# Altium PCB PCB_Blocks.PcbDoc
Units mm, origin at the board's own origin, x right, y up, seen from the top; angles counter-clockwise.
Board outline 230 x 130 mm, 2 copper layers (Top Layer, Bottom Layer), stack 1.671 mm thick; 23 components, 60 nets, 230 pads, 0 vias.
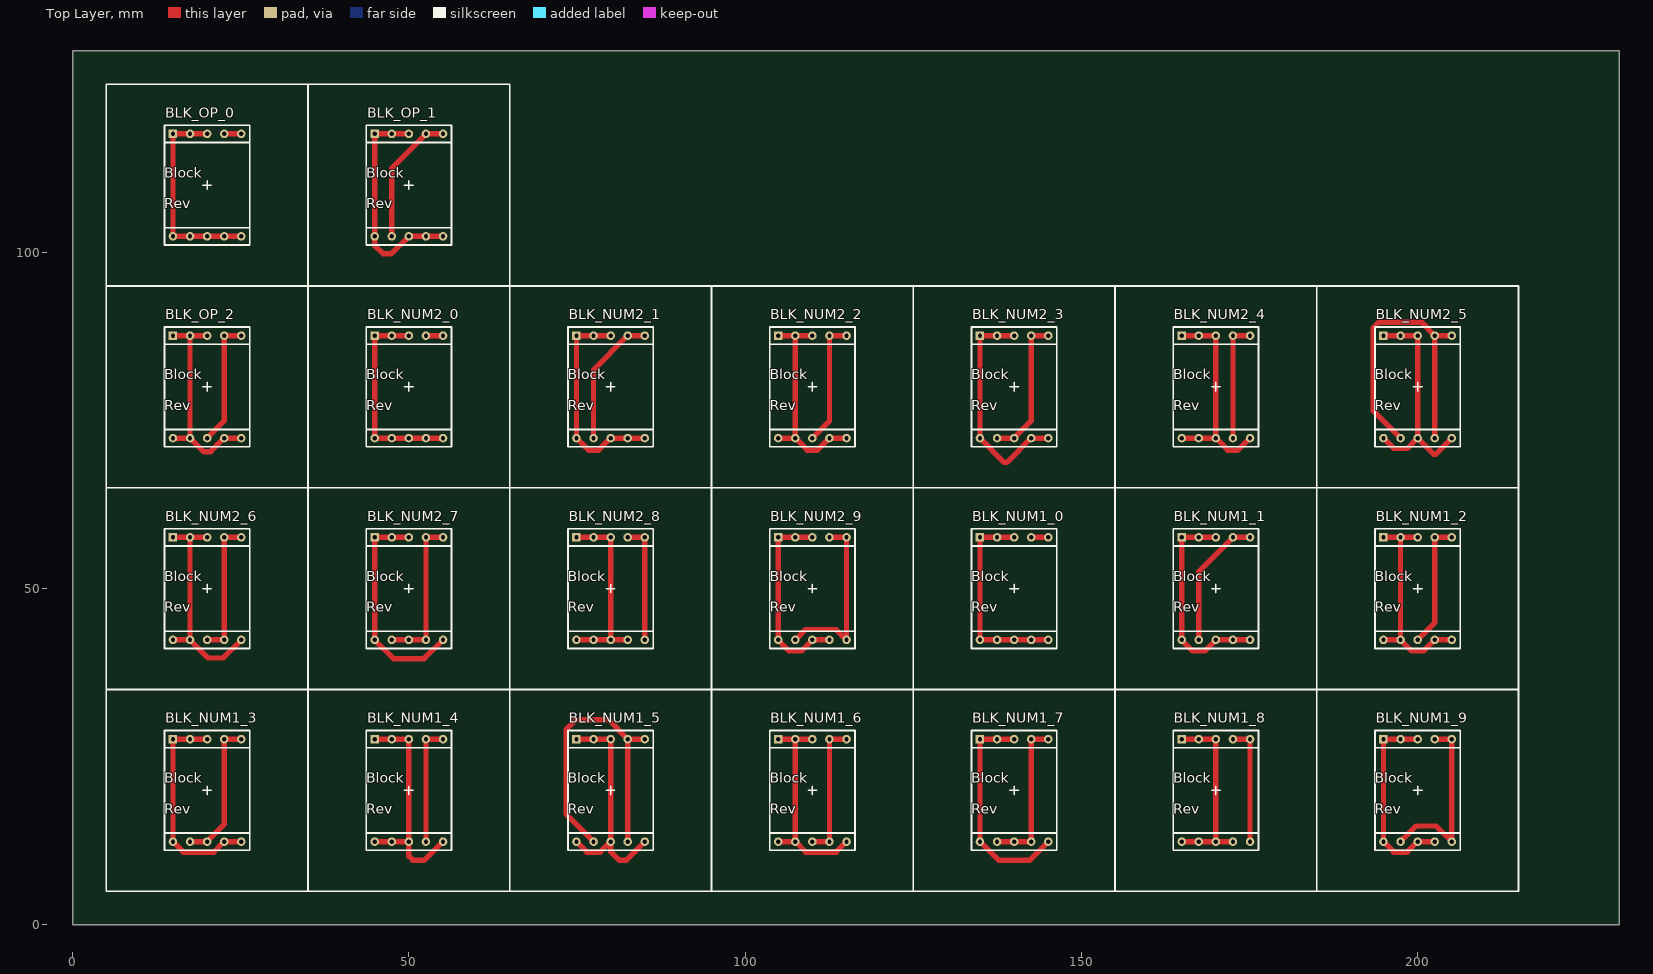
[diagram p0: Top Layer view]
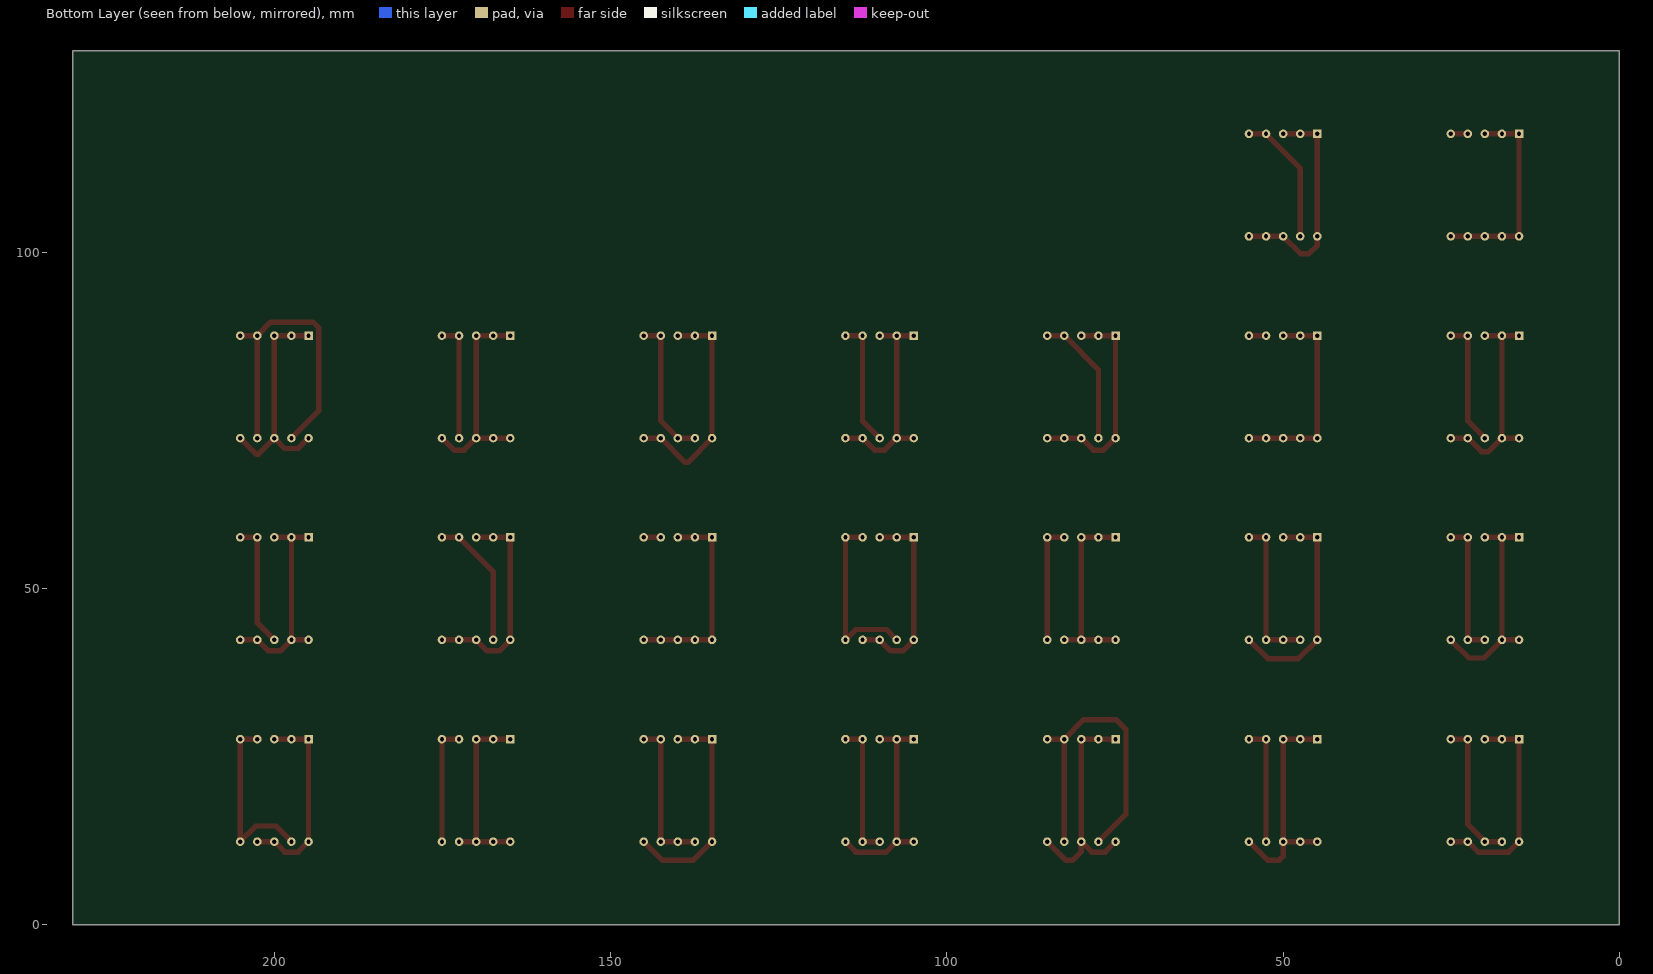
[diagram p1: Bottom Layer view, seen from below]

## Layer stack, top to bottom
Top Solder: solder mask 0.0102, Solder Resist, Dk 3.5
Top Layer: signal copper 0.0356
Dielectric 1: dielectric 1.6, FR-4, Dk 4.8
Bottom Layer: signal copper 0.0356
Bottom Solder: solder mask 0.0102, Solder Resist, Dk 3.5

## Board outline
0,0 0,130 230,130 230,0

## Design rules (kind name [scope] priority, off if disabled: settings)
Clearance [All] p1: gap=0.5 ignorepadtopadclearanceinfootprint=FALSE
PolygonConnect [All] p1: connectstyle=Relief reliefconductorwidth=0.254 reliefentries=4 polygonreliefangle="90 Angle" airgapwidth=0.254
RoutingLayers [All] p1: top layer_v5=TRUE bottom layer_v5=FALSE
RoutingVias [All] p1: holewidth=0.9 width=1.2 viastyle="Through Hole" minholewidth=0.9 minwidth=1.2 maxholewidth=0.9 maxwidth=1.2
SolderMaskExpansion [All] p1: expansion=0.102 istentingtop=FALSE
UnRoutedNet [All] p1: checkbadconnections=TRUE
Width [All] p1: maxlimit=0.8 minlimit=0.8 preferedwidth=0.8
28 further rules are at their usual default settings.

## Components (designator, comment, footprint, x,y, rotation, side; value= is the part's Value field where it differs from the comment)
BLK_NUM1_0 "6x5 Block" Block_6x5 140,57.62 r0 top
BLK_NUM1_1 "6x5 Block" Block_6x5 170,57.62 r0 top
BLK_NUM1_2 "6x5 Block" Block_6x5 200,57.62 r0 top
BLK_NUM1_3 "6x5 Block" Block_6x5 20,27.62 r0 top
BLK_NUM1_4 "6x5 Block" Block_6x5 50,27.62 r0 top
BLK_NUM1_5 "6x5 Block" Block_6x5 80,27.62 r0 top
BLK_NUM1_6 "6x5 Block" Block_6x5 110,27.62 r0 top
BLK_NUM1_7 "6x5 Block" Block_6x5 140,27.62 r0 top
BLK_NUM1_8 "6x5 Block" Block_6x5 170,27.62 r0 top
BLK_NUM1_9 "6x5 Block" Block_6x5 200,27.62 r0 top
BLK_NUM2_0 "6x5 Block" Block_6x5 50,87.62 r0 top
BLK_NUM2_1 "6x5 Block" Block_6x5 80,87.62 r0 top
BLK_NUM2_2 "6x5 Block" Block_6x5 110,87.62 r0 top
BLK_NUM2_3 "6x5 Block" Block_6x5 140,87.62 r0 top
BLK_NUM2_4 "6x5 Block" Block_6x5 170,87.62 r0 top
BLK_NUM2_5 "6x5 Block" Block_6x5 200,87.62 r0 top
BLK_NUM2_6 "6x5 Block" Block_6x5 20,57.62 r0 top
BLK_NUM2_7 "6x5 Block" Block_6x5 50,57.62 r0 top
BLK_NUM2_8 "6x5 Block" Block_6x5 80,57.62 r0 top
BLK_NUM2_9 "6x5 Block" Block_6x5 110,57.62 r0 top
BLK_OP_0 "6x5 Block" Block_6x5 20,117.62 r0 top
BLK_OP_1 "6x5 Block" Block_6x5 50,117.62 r0 top
BLK_OP_2 "6x5 Block" Block_6x5 20,87.62 r0 top

## Footprints (in the part's own frame and the unit in brackets; to place one, negate y for a bottom-side part, rotate by r counter-clockwise, add the part's x,y. Pads: shape width x height; smd on the part's side, far side on the other; paste and mask are expansions set on the pad)
Block_6x5 [mm]
  rect 1.27x1.27 hole 0.635: 1(-5.08,0)
  round 1.27 hole 0.635: 2(-2.54,0) 3(0,0) 4(2.54,0) 5(5.08,0) 6(5.08,-15.24) 7(2.54,-15.24) 8(0,-15.24) 9(-2.54,-15.24) 10(-5.08,-15.24)
  silkscreen extent -6.35,-16.51 6.35,1.27

## Part data
BLK_NUM1_0 BLK_NUM1_1 BLK_NUM1_2 BLK_NUM1_3 BLK_NUM1_4 BLK_NUM1_5 BLK_NUM1_6 BLK_NUM1_7 BLK_NUM1_8 BLK_NUM1_9 BLK_NUM2_0 BLK_NUM2_1 BLK_NUM2_2 BLK_NUM2_3 BLK_NUM2_4 BLK_NUM2_5 BLK_NUM2_6 BLK_NUM2_7 BLK_NUM2_8 BLK_NUM2_9 BLK_OP_0 BLK_OP_1 BLK_OP_2: library part Block_6x5

## Nets (pads, with @x,y where several pads share a name; then routed paths per layer and width w, separated by ;. In a path a pad name is that pad's centre, name@x,y a point inside that pad or via, vN(x,y) a via of type N, cw(c..) or ccw(c..) an arc to the next point about the centre after c; other vN are vias at no path point)
NetBLK_NUM1_0_1: BLK_NUM1_0.1 BLK_NUM1_0.2 BLK_NUM1_0.3 BLK_NUM1_0.6 BLK_NUM1_0.7 BLK_NUM1_0.8 BLK_NUM1_0.9 BLK_NUM1_0.10 | length 30.5
  Top Layer w0.8: BLK_NUM1_0.3 BLK_NUM1_0.2 BLK_NUM1_0.1 BLK_NUM1_0.10 BLK_NUM1_0.9 BLK_NUM1_0.8 BLK_NUM1_0.7 BLK_NUM1_0.6
NetBLK_NUM1_0_4: BLK_NUM1_0.4 BLK_NUM1_0.5 | length 2.5
  Top Layer w0.8: BLK_NUM1_0.4 BLK_NUM1_0.5
NetBLK_NUM1_1_1: BLK_NUM1_1.1 BLK_NUM1_1.2 BLK_NUM1_1.3 BLK_NUM1_1.6 BLK_NUM1_1.7 BLK_NUM1_1.8 BLK_NUM1_1.10 | length 31.8
  Top Layer w0.8: BLK_NUM1_1.3 BLK_NUM1_1.2 BLK_NUM1_1.1 BLK_NUM1_1.10 166.555,40.745 168.365,40.745 BLK_NUM1_1.8 BLK_NUM1_1.7 BLK_NUM1_1.6
NetBLK_NUM1_1_4: BLK_NUM1_1.4 BLK_NUM1_1.5 BLK_NUM1_1.9 | length 19.9
  Top Layer w0.8: BLK_NUM1_1.9 167.46,52.54 BLK_NUM1_1.4 BLK_NUM1_1.5
NetBLK_NUM1_2_1: BLK_NUM1_2.1 BLK_NUM1_2.2 BLK_NUM1_2.3 BLK_NUM1_2.6 BLK_NUM1_2.7 BLK_NUM1_2.9 BLK_NUM1_2.10 | length 31.8
  Top Layer w0.8: BLK_NUM1_2.10 BLK_NUM1_2.9 ; BLK_NUM1_2.1 BLK_NUM1_2.2 ; BLK_NUM1_2.3 BLK_NUM1_2.2 ; BLK_NUM1_2.6 BLK_NUM1_2.7 200.905,40.745 199.095,40.745 BLK_NUM1_2.9 ; BLK_NUM1_2.9 BLK_NUM1_2.2
NetBLK_NUM1_2_4: BLK_NUM1_2.4 BLK_NUM1_2.5 BLK_NUM1_2.8 | length 18.8
  Top Layer w0.8: BLK_NUM1_2.8 202.54,44.92 BLK_NUM1_2.4 BLK_NUM1_2.5
NetBLK_NUM1_3_1: BLK_NUM1_3.1 BLK_NUM1_3.2 BLK_NUM1_3.3 BLK_NUM1_3.6 BLK_NUM1_3.7 BLK_NUM1_3.10 | length 31.8
  Top Layer w0.8: BLK_NUM1_3.3 BLK_NUM1_3.2 BLK_NUM1_3.1 BLK_NUM1_3.10 16.476,10.824 20.984,10.824 BLK_NUM1_3.7 BLK_NUM1_3.6
NetBLK_NUM1_3_4: BLK_NUM1_3.4 BLK_NUM1_3.5 BLK_NUM1_3.8 BLK_NUM1_3.9 | length 21.4
  Top Layer w0.8: BLK_NUM1_3.9 BLK_NUM1_3.8 22.54,14.92 BLK_NUM1_3.4 BLK_NUM1_3.5
NetBLK_NUM1_4_1: BLK_NUM1_4.1 BLK_NUM1_4.2 BLK_NUM1_4.3 BLK_NUM1_4.6 BLK_NUM1_4.8 BLK_NUM1_4.9 BLK_NUM1_4.10 | length 34
  Top Layer w0.8: BLK_NUM1_4.10 BLK_NUM1_4.9 BLK_NUM1_4.8 ; BLK_NUM1_4.1 BLK_NUM1_4.2 BLK_NUM1_4.3 BLK_NUM1_4.8 ; BLK_NUM1_4.6 52.33,9.63 50.583,9.63 50,10.213 BLK_NUM1_4.8
NetBLK_NUM1_4_4: BLK_NUM1_4.4 BLK_NUM1_4.5 BLK_NUM1_4.7 | length 17.8
  Top Layer w0.8: BLK_NUM1_4.7 BLK_NUM1_4.4 BLK_NUM1_4.5
NetBLK_NUM1_5_1: BLK_NUM1_5.1 BLK_NUM1_5.2 BLK_NUM1_5.3 BLK_NUM1_5.6 BLK_NUM1_5.8 BLK_NUM1_5.10 | length 34.9
  Top Layer w0.8: BLK_NUM1_5.10 76.476,10.824 78.444,10.824 BLK_NUM1_5.8 ; BLK_NUM1_5.1 BLK_NUM1_5.2 BLK_NUM1_5.3 BLK_NUM1_5.8 ; BLK_NUM1_5.6 82.33,9.63 81.27,9.63 80,10.9 BLK_NUM1_5.8
NetBLK_NUM1_5_4: BLK_NUM1_5.4 BLK_NUM1_5.5 BLK_NUM1_5.7 BLK_NUM1_5.9 | length 47.1
  Top Layer w0.8: BLK_NUM1_5.9 73.367,16.473 73.367,29.036 74.84,30.509 79.651,30.509 BLK_NUM1_5.4 ; BLK_NUM1_5.7 BLK_NUM1_5.4 ; BLK_NUM1_5.5 BLK_NUM1_5.4
NetBLK_NUM1_6_1: BLK_NUM1_6.1 BLK_NUM1_6.2 BLK_NUM1_6.3 BLK_NUM1_6.6 BLK_NUM1_6.9 BLK_NUM1_6.10 | length 31.8
  Top Layer w0.8: BLK_NUM1_6.10 BLK_NUM1_6.9 ; BLK_NUM1_6.1 BLK_NUM1_6.2 ; BLK_NUM1_6.3 BLK_NUM1_6.2 ; BLK_NUM1_6.6 113.524,10.824 109.016,10.824 BLK_NUM1_6.9 ; BLK_NUM1_6.9 BLK_NUM1_6.2
NetBLK_NUM1_6_4: BLK_NUM1_6.4 BLK_NUM1_6.5 BLK_NUM1_6.7 BLK_NUM1_6.8 | length 20.3
  Top Layer w0.8: BLK_NUM1_6.8 BLK_NUM1_6.7 BLK_NUM1_6.4 BLK_NUM1_6.5
NetBLK_NUM1_7_1: BLK_NUM1_7.1 BLK_NUM1_7.2 BLK_NUM1_7.3 BLK_NUM1_7.6 BLK_NUM1_7.10 | length 32.8
  Top Layer w0.8: BLK_NUM1_7.3 BLK_NUM1_7.2 BLK_NUM1_7.1 BLK_NUM1_7.10 137.67,9.63 142.33,9.63 BLK_NUM1_7.6
NetBLK_NUM1_7_4: BLK_NUM1_7.4 BLK_NUM1_7.5 BLK_NUM1_7.7 BLK_NUM1_7.8 BLK_NUM1_7.9 | length 22.9
  Top Layer w0.8: BLK_NUM1_7.9 BLK_NUM1_7.8 BLK_NUM1_7.7 BLK_NUM1_7.4 BLK_NUM1_7.5
NetBLK_NUM1_8_1: BLK_NUM1_8.1 BLK_NUM1_8.2 BLK_NUM1_8.3 BLK_NUM1_8.7 BLK_NUM1_8.8 BLK_NUM1_8.9 BLK_NUM1_8.10 | length 27.9
  Top Layer w0.8: BLK_NUM1_8.10 BLK_NUM1_8.9 BLK_NUM1_8.8 ; BLK_NUM1_8.1 BLK_NUM1_8.2 BLK_NUM1_8.3 BLK_NUM1_8.8 ; BLK_NUM1_8.7 BLK_NUM1_8.8
NetBLK_NUM1_8_4: BLK_NUM1_8.4 BLK_NUM1_8.5 BLK_NUM1_8.6 | length 17.8
  Top Layer w0.8: BLK_NUM1_8.4 BLK_NUM1_8.5 BLK_NUM1_8.6
NetBLK_NUM1_9_1: BLK_NUM1_9.1 BLK_NUM1_9.2 BLK_NUM1_9.3 BLK_NUM1_9.7 BLK_NUM1_9.8 BLK_NUM1_9.10 | length 29.2
  Top Layer w0.8: BLK_NUM1_9.3 BLK_NUM1_9.2 BLK_NUM1_9.1 BLK_NUM1_9.10 196.476,10.824 198.444,10.824 BLK_NUM1_9.8 BLK_NUM1_9.7
NetBLK_NUM1_9_4: BLK_NUM1_9.4 BLK_NUM1_9.5 BLK_NUM1_9.6 BLK_NUM1_9.9 | length 27.3
  Top Layer w0.8: BLK_NUM1_9.9 199.79,14.71 202.75,14.71 BLK_NUM1_9.6 BLK_NUM1_9.5 BLK_NUM1_9.4
NetBLK_NUM2_0_1: BLK_NUM2_0.1 BLK_NUM2_0.2 BLK_NUM2_0.3 BLK_NUM2_0.6 BLK_NUM2_0.7 BLK_NUM2_0.8 BLK_NUM2_0.9 BLK_NUM2_0.10 | length 30.5
  Top Layer w0.8: BLK_NUM2_0.3 BLK_NUM2_0.2 BLK_NUM2_0.1 BLK_NUM2_0.10 BLK_NUM2_0.9 BLK_NUM2_0.8 BLK_NUM2_0.7 BLK_NUM2_0.6
NetBLK_NUM2_0_4: BLK_NUM2_0.4 BLK_NUM2_0.5 | length 2.5
  Top Layer w0.8: BLK_NUM2_0.4 BLK_NUM2_0.5
NetBLK_NUM2_1_1: BLK_NUM2_1.1 BLK_NUM2_1.2 BLK_NUM2_1.3 BLK_NUM2_1.6 BLK_NUM2_1.7 BLK_NUM2_1.8 BLK_NUM2_1.10 | length 32
  Top Layer w0.8: BLK_NUM2_1.3 BLK_NUM2_1.2 BLK_NUM2_1.1 BLK_NUM2_1.10 76.71,70.59 78.21,70.59 BLK_NUM2_1.8 BLK_NUM2_1.7 BLK_NUM2_1.6
NetBLK_NUM2_1_4: BLK_NUM2_1.4 BLK_NUM2_1.5 BLK_NUM2_1.9 | length 19.9
  Top Layer w0.8: BLK_NUM2_1.9 77.46,82.54 BLK_NUM2_1.4 BLK_NUM2_1.5
NetBLK_NUM2_2_1: BLK_NUM2_2.1 BLK_NUM2_2.2 BLK_NUM2_2.3 BLK_NUM2_2.6 BLK_NUM2_2.7 BLK_NUM2_2.9 BLK_NUM2_2.10 | length 32
  Top Layer w0.8: BLK_NUM2_2.10 BLK_NUM2_2.9 ; BLK_NUM2_2.1 BLK_NUM2_2.2 ; BLK_NUM2_2.3 BLK_NUM2_2.2 ; BLK_NUM2_2.6 BLK_NUM2_2.7 110.75,70.59 109.25,70.59 BLK_NUM2_2.9 ; BLK_NUM2_2.9 BLK_NUM2_2.2
NetBLK_NUM2_2_4: BLK_NUM2_2.4 BLK_NUM2_2.5 BLK_NUM2_2.8 | length 18.8
  Top Layer w0.8: BLK_NUM2_2.8 112.54,74.92 BLK_NUM2_2.4 BLK_NUM2_2.5
NetBLK_NUM2_3_1: BLK_NUM2_3.1 BLK_NUM2_3.2 BLK_NUM2_3.3 BLK_NUM2_3.6 BLK_NUM2_3.7 BLK_NUM2_3.10 | length 33.5
  Top Layer w0.8: BLK_NUM2_3.3 BLK_NUM2_3.2 BLK_NUM2_3.1 BLK_NUM2_3.10 138.513,68.787 138.947,68.787 BLK_NUM2_3.7 BLK_NUM2_3.6
NetBLK_NUM2_3_4: BLK_NUM2_3.4 BLK_NUM2_3.5 BLK_NUM2_3.8 BLK_NUM2_3.9 | length 21.4
  Top Layer w0.8: BLK_NUM2_3.9 BLK_NUM2_3.8 142.54,74.92 BLK_NUM2_3.4 BLK_NUM2_3.5
NetBLK_NUM2_4_1: BLK_NUM2_4.1 BLK_NUM2_4.2 BLK_NUM2_4.3 BLK_NUM2_4.6 BLK_NUM2_4.8 BLK_NUM2_4.9 BLK_NUM2_4.10 | length 32
  Top Layer w0.8: BLK_NUM2_4.10 BLK_NUM2_4.9 BLK_NUM2_4.8 ; BLK_NUM2_4.1 BLK_NUM2_4.2 BLK_NUM2_4.3 BLK_NUM2_4.8 ; BLK_NUM2_4.6 173.29,70.59 171.79,70.59 BLK_NUM2_4.8
NetBLK_NUM2_4_4: BLK_NUM2_4.4 BLK_NUM2_4.5 BLK_NUM2_4.7 | length 17.8
  Top Layer w0.8: BLK_NUM2_4.7 BLK_NUM2_4.4 BLK_NUM2_4.5
NetBLK_NUM2_5_1: BLK_NUM2_5.1 BLK_NUM2_5.2 BLK_NUM2_5.3 BLK_NUM2_5.6 BLK_NUM2_5.8 BLK_NUM2_5.10 | length 33.8
  Top Layer w0.8: BLK_NUM2_5.10 196.456,70.844 198.464,70.844 BLK_NUM2_5.8 ; BLK_NUM2_5.1 BLK_NUM2_5.2 BLK_NUM2_5.3 BLK_NUM2_5.8 ; BLK_NUM2_5.6 202.655,69.955 202.425,69.955 BLK_NUM2_5.8
NetBLK_NUM2_5_4: BLK_NUM2_5.4 BLK_NUM2_5.5 BLK_NUM2_5.7 BLK_NUM2_5.9 | length 46.2
  Top Layer w0.8: BLK_NUM2_5.9 193.382,76.458 193.382,88.776 194.22,89.615 200.545,89.615 BLK_NUM2_5.4 ; BLK_NUM2_5.7 BLK_NUM2_5.4 ; BLK_NUM2_5.5 BLK_NUM2_5.4
NetBLK_NUM2_6_1: BLK_NUM2_6.1 BLK_NUM2_6.2 BLK_NUM2_6.3 BLK_NUM2_6.6 BLK_NUM2_6.9 BLK_NUM2_6.10 | length 32.7
  Top Layer w0.8: BLK_NUM2_6.10 BLK_NUM2_6.9 ; BLK_NUM2_6.1 BLK_NUM2_6.2 ; BLK_NUM2_6.3 BLK_NUM2_6.2 ; BLK_NUM2_6.6 22.378,39.678 20.162,39.678 BLK_NUM2_6.9 ; BLK_NUM2_6.9 BLK_NUM2_6.2
NetBLK_NUM2_6_4: BLK_NUM2_6.4 BLK_NUM2_6.5 BLK_NUM2_6.7 BLK_NUM2_6.8 | length 20.3
  Top Layer w0.8: BLK_NUM2_6.8 BLK_NUM2_6.7 BLK_NUM2_6.4 BLK_NUM2_6.5
NetBLK_NUM2_7_1: BLK_NUM2_7.1 BLK_NUM2_7.2 BLK_NUM2_7.3 BLK_NUM2_7.6 BLK_NUM2_7.10 | length 32.8
  Top Layer w0.8: BLK_NUM2_7.3 BLK_NUM2_7.2 BLK_NUM2_7.1 BLK_NUM2_7.10 47.723,39.577 52.277,39.577 BLK_NUM2_7.6
NetBLK_NUM2_7_4: BLK_NUM2_7.4 BLK_NUM2_7.5 BLK_NUM2_7.7 BLK_NUM2_7.8 BLK_NUM2_7.9 | length 22.9
  Top Layer w0.8: BLK_NUM2_7.9 BLK_NUM2_7.8 BLK_NUM2_7.7 BLK_NUM2_7.4 BLK_NUM2_7.5
NetBLK_NUM2_8_1: BLK_NUM2_8.1 BLK_NUM2_8.2 BLK_NUM2_8.3 BLK_NUM2_8.7 BLK_NUM2_8.8 BLK_NUM2_8.9 BLK_NUM2_8.10 | length 27.9
  Top Layer w0.8: BLK_NUM2_8.10 BLK_NUM2_8.9 BLK_NUM2_8.8 ; BLK_NUM2_8.1 BLK_NUM2_8.2 BLK_NUM2_8.3 BLK_NUM2_8.8 ; BLK_NUM2_8.7 BLK_NUM2_8.8
NetBLK_NUM2_8_4: BLK_NUM2_8.4 BLK_NUM2_8.5 BLK_NUM2_8.6 | length 17.8
  Top Layer w0.8: BLK_NUM2_8.4 BLK_NUM2_8.5 BLK_NUM2_8.6
NetBLK_NUM2_9_1: BLK_NUM2_9.1 BLK_NUM2_9.2 BLK_NUM2_9.3 BLK_NUM2_9.7 BLK_NUM2_9.8 BLK_NUM2_9.10 | length 29.3
  Top Layer w0.8: BLK_NUM2_9.3 BLK_NUM2_9.2 BLK_NUM2_9.1 BLK_NUM2_9.10 106.555,40.745 108.365,40.745 BLK_NUM2_9.8 BLK_NUM2_9.7
NetBLK_NUM2_9_4: BLK_NUM2_9.4 BLK_NUM2_9.5 BLK_NUM2_9.6 BLK_NUM2_9.9 | length 26.7
  Top Layer w0.8: BLK_NUM2_9.9 109,43.92 113.54,43.92 BLK_NUM2_9.6 BLK_NUM2_9.5 BLK_NUM2_9.4
NetBLK_OP_0_1: BLK_OP_0.1 BLK_OP_0.2 BLK_OP_0.3 BLK_OP_0.6 BLK_OP_0.7 BLK_OP_0.8 BLK_OP_0.9 BLK_OP_0.10 | length 30.5
  Top Layer w0.8: BLK_OP_0.3 BLK_OP_0.2 BLK_OP_0.1 BLK_OP_0.10 BLK_OP_0.9 BLK_OP_0.8 BLK_OP_0.7 BLK_OP_0.6
NetBLK_OP_0_4: BLK_OP_0.4 BLK_OP_0.5 | length 2.5
  Top Layer w0.8: BLK_OP_0.4 BLK_OP_0.5
NetBLK_OP_1_1: BLK_OP_1.1 BLK_OP_1.2 BLK_OP_1.3 BLK_OP_1.6 BLK_OP_1.7 BLK_OP_1.8 BLK_OP_1.10 | length 33.4
  Top Layer w0.8: BLK_OP_1.3 BLK_OP_1.2 BLK_OP_1.1 BLK_OP_1.10 44.92,101.03 46.15,99.8 47.42,99.8 BLK_OP_1.8 BLK_OP_1.7 BLK_OP_1.6
NetBLK_OP_1_4: BLK_OP_1.4 BLK_OP_1.5 BLK_OP_1.9 | length 19.9
  Top Layer w0.8: BLK_OP_1.9 47.46,112.54 BLK_OP_1.4 BLK_OP_1.5
NetBLK_OP_2_1: BLK_OP_2.1 BLK_OP_2.2 BLK_OP_2.3 BLK_OP_2.6 BLK_OP_2.7 BLK_OP_2.9 BLK_OP_2.10 | length 32.1
  Top Layer w0.8: BLK_OP_2.10 BLK_OP_2.9 ; BLK_OP_2.1 BLK_OP_2.2 ; BLK_OP_2.3 BLK_OP_2.2 ; BLK_OP_2.6 BLK_OP_2.7 20.535,70.375 19.465,70.375 BLK_OP_2.9 ; BLK_OP_2.9 BLK_OP_2.2
NetBLK_OP_2_4: BLK_OP_2.4 BLK_OP_2.5 BLK_OP_2.8 | length 18.8
  Top Layer w0.8: BLK_OP_2.8 22.54,74.92 BLK_OP_2.4 BLK_OP_2.5
NetBLK_OP_3_1: 
NetBLK_OP_3_4: 
NetBLK_OP_4_1: 
NetBLK_OP_4_4: 
NetBLK_OP_5_1: 
NetBLK_OP_5_4: 
NetBLK_OP_6_1: 
NetBLK_OP_6_4: 
NetBLK_OP_7_1: 
NetBLK_OP_7_4: 
NetBLK_OP_8_1: 
NetBLK_OP_8_4: 
NetBLK_OP_9_1: 
NetBLK_OP_9_4: 

## Polygon pours and split planes (outlines as drawn)
no net on Layer0 "Default Coverlay 1 Bottom" (split plane): 0,130 230,130 230,0 0,0
no net on Layer0 "Default Coverlay 1 Top" (split plane): 0,130 230,130 230,0 0,0

## Silkscreen, mask and mechanical layers (free items; w line width, h text height)
Top Overlay:
  lines w0.254: 5,35 35,35 ; 5,35 5,65 ; 5,35 35,35 ; 5,35 5,5 35,5 ; 5,65 35,65 ; 5,65 35,65 ; 5,65 5,95 ; 5,95 35,95 ; 5,95 35,95 ; 5,95 5,125 35,125 ; 35,5 65,5 ; 35,5 35,35 ; 35,5 35,35 ; 35,35 65,35 ; 35,35 65,35 ; 35,35 35,65 ; 35,35 35,65 ; 35,65 65,65 ; 35,65 35,95 ; 35,65 65,65 ; 35,65 35,95 ; 35,95 35,125 ; 35,95 65,95 ; 35,95 35,125 ; 35,95 65,95 ; 35,125 65,125 65,95 ; 65,5 65,35 ; 65,5 95,5 ; 65,5 65,35 ; 65,35 95,35 ; 65,35 65,65 ; 65,35 65,65 ; 65,35 95,35 ; 65,65 95,65 ; 65,65 95,65 ; 65,65 65,95 ; 65,65 65,95 ; 65,95 95,95 ; 95,5 125,5 ; 95,5 95,35 ; 95,5 95,35 ; 95,35 95,65 ; 95,35 125,35 ; 95,35 125,35 ; 95,35 95,65 ; 95,65 125,65 ; 95,65 95,95 ; 95,65 95,95 ; 95,65 125,65 ; 95,95 125,95 ; 125,5 125,35 ; 125,5 155,5 ; 125,5 125,35 ; 125,35 155,35 ; 125,35 125,65 ; 125,35 155,35 ; 125,35 125,65 ; 125,65 125,95 ; 125,65 155,65 ; 125,65 155,65 ; 125,65 125,95 ; 125,95 155,95 ; 155,5 185,5 ; 155,5 155,35 ; 155,5 155,35 ; 155,35 185,35 ; 155,35 155,65 ; 155,35 185,35 ; 155,35 155,65 ; 155,35 185,35 ; 155,35 185,35 ; 155,65 155,95 ; 155,65 185,65 ; 155,65 155,95 ; 155,65 185,65 ; 155,95 185,95 ; 185,5 185,35 ; 185,5 215,5 215,35 ; 185,5 185,35 ; 185,35 215,35 ; 185,35 185,65 ; 185,35 215,35 ; 185,35 185,65 ; 185,65 215,65 ; 185,65 185,95 ; 185,65 215,65 ; 185,65 185,95 ; 185,95 215,95 215,65 ; 215,35 215,65
Mechanical 13:
  the board outline again, w0.254

## Text inside footprints (layer, text, board x,y; h text height)
BLK_NUM1_0: Top Overlay "Block /  / Rev" at 133.65,46.546 h1.52
BLK_NUM1_1: Top Overlay "Block /  / Rev" at 163.65,46.546 h1.52
BLK_NUM1_2: Top Overlay "Block /  / Rev" at 193.65,46.546 h1.52
BLK_NUM1_3: Top Overlay "Block /  / Rev" at 13.65,16.546 h1.52
BLK_NUM1_4: Top Overlay "Block /  / Rev" at 43.65,16.546 h1.52
BLK_NUM1_5: Top Overlay "Block /  / Rev" at 73.65,16.546 h1.52
BLK_NUM1_6: Top Overlay "Block /  / Rev" at 103.65,16.546 h1.52
BLK_NUM1_7: Top Overlay "Block /  / Rev" at 133.65,16.546 h1.52
BLK_NUM1_8: Top Overlay "Block /  / Rev" at 163.65,16.546 h1.52
BLK_NUM1_9: Top Overlay "Block /  / Rev" at 193.65,16.546 h1.52
BLK_NUM2_0: Top Overlay "Block /  / Rev" at 43.65,76.546 h1.52
BLK_NUM2_1: Top Overlay "Block /  / Rev" at 73.65,76.546 h1.52
BLK_NUM2_2: Top Overlay "Block /  / Rev" at 103.65,76.546 h1.52
BLK_NUM2_3: Top Overlay "Block /  / Rev" at 133.65,76.546 h1.52
BLK_NUM2_4: Top Overlay "Block /  / Rev" at 163.65,76.546 h1.52
BLK_NUM2_5: Top Overlay "Block /  / Rev" at 193.65,76.546 h1.52
BLK_NUM2_6: Top Overlay "Block /  / Rev" at 13.65,46.546 h1.52
BLK_NUM2_7: Top Overlay "Block /  / Rev" at 43.65,46.546 h1.52
BLK_NUM2_8: Top Overlay "Block /  / Rev" at 73.65,46.546 h1.52
BLK_NUM2_9: Top Overlay "Block /  / Rev" at 103.65,46.546 h1.52
BLK_OP_0: Top Overlay "Block /  / Rev" at 13.65,106.546 h1.52
BLK_OP_1: Top Overlay "Block /  / Rev" at 43.65,106.546 h1.52
BLK_OP_2: Top Overlay "Block /  / Rev" at 13.65,76.546 h1.52